# Altium PCB 2014 10 1 主控板 KL25Z128VLK4.PCBDOC
Units mil, origin at the board's own origin, x right, y up, seen from the top; angles counter-clockwise.
Board outline 3699 x 2447 mil, 2 copper layers (TopLayer, BottomLayer); 69 components, 96 nets, 348 pads, 94 vias.
Unrouted connection lines stored in the file: 1.
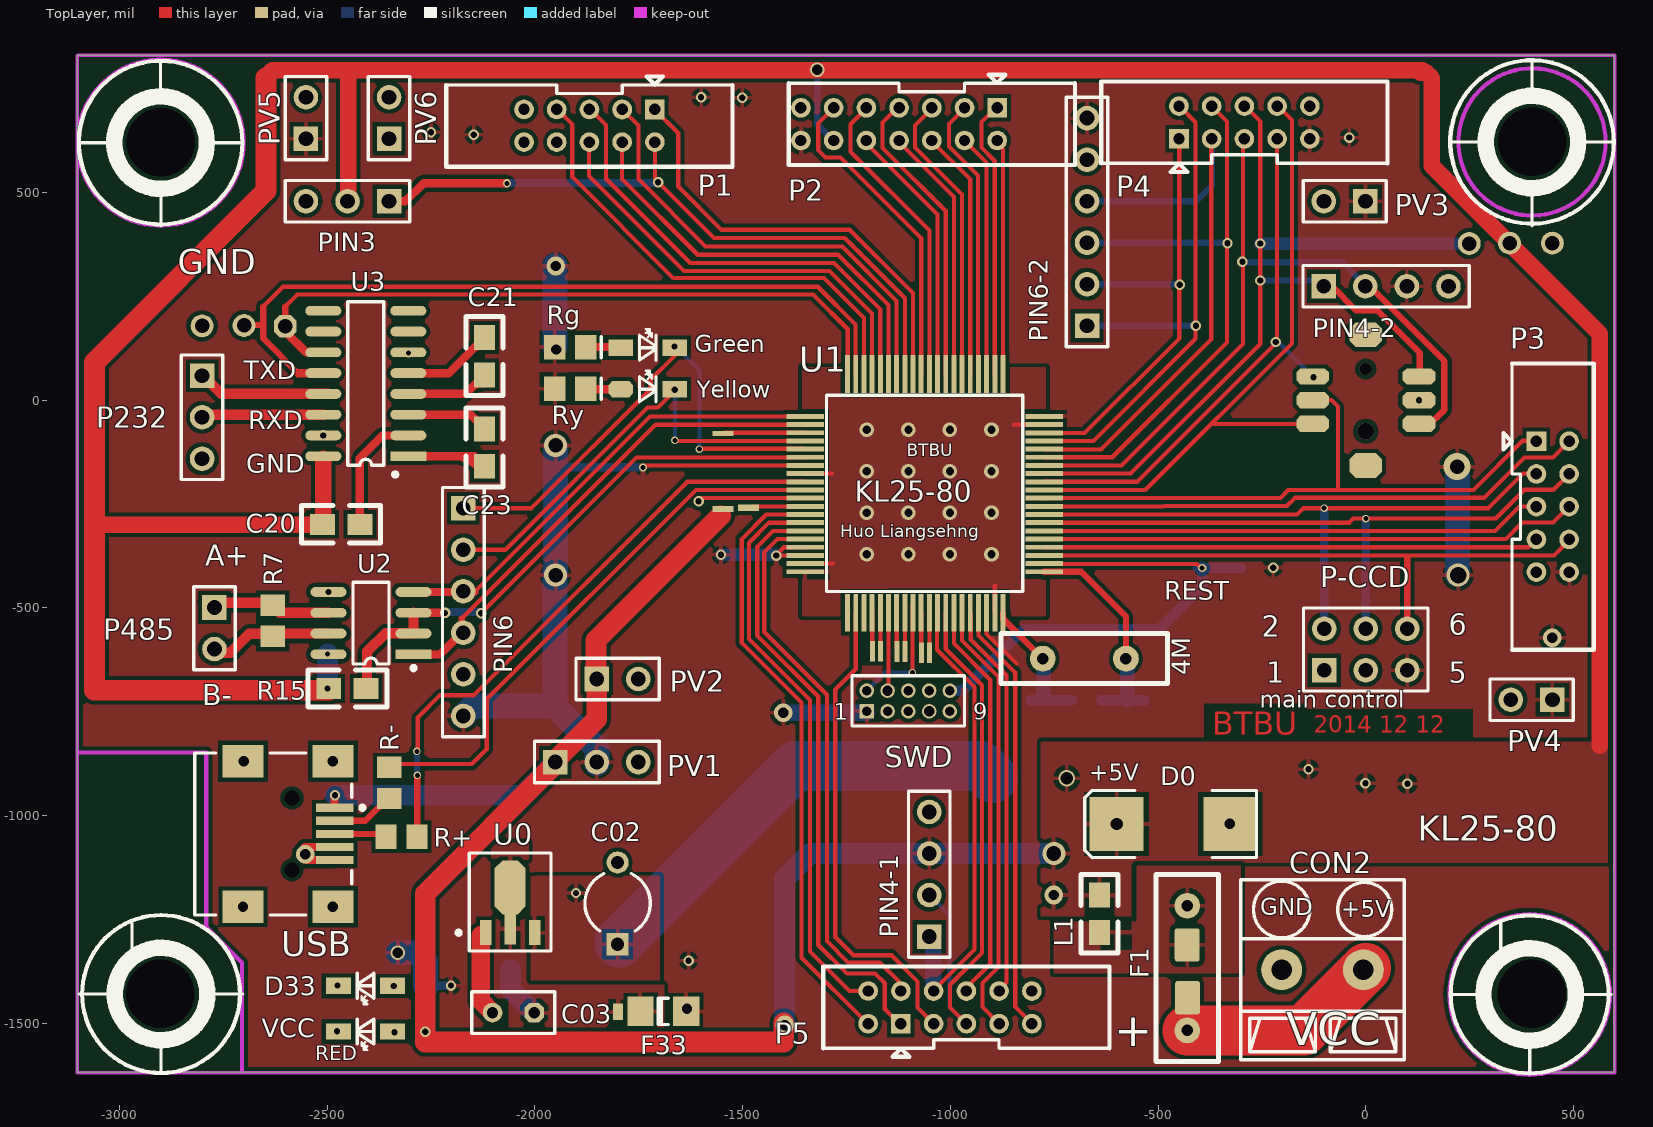
[diagram p0: TopLayer view]
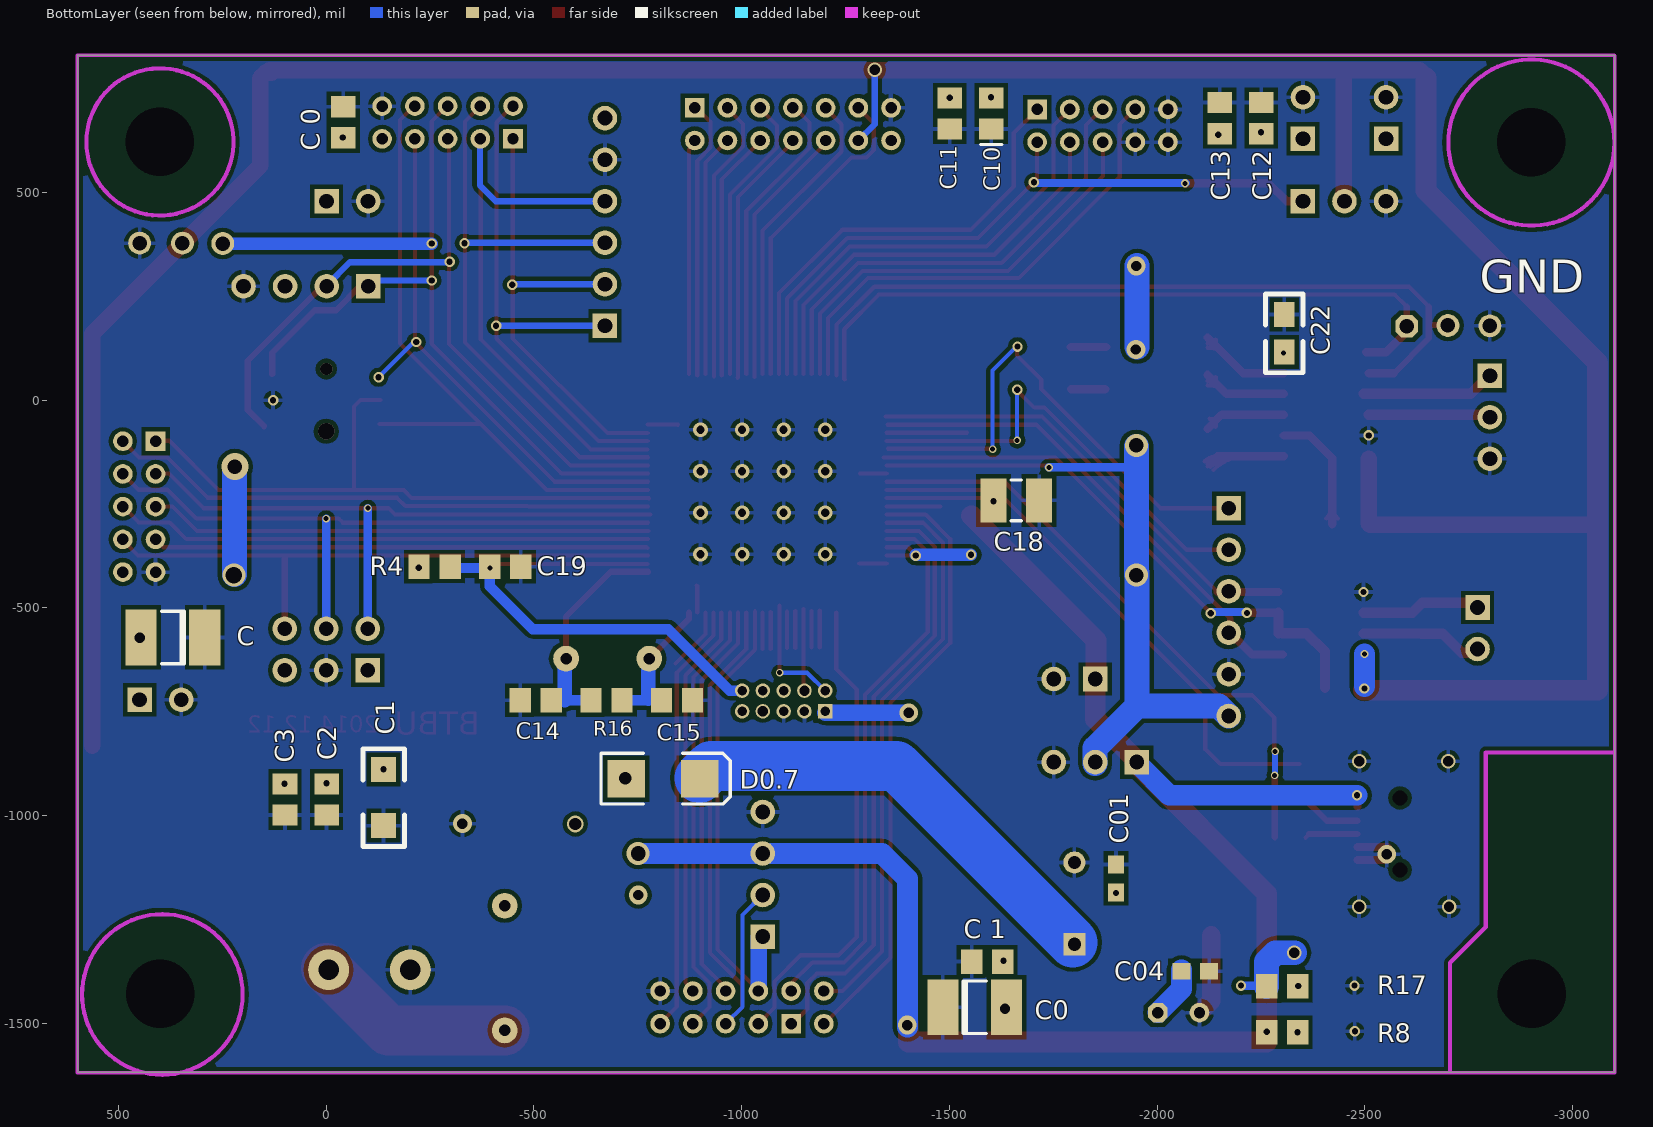
[diagram p1: BottomLayer view, seen from below]

## Layer stack, top to bottom
TopLayer: signal copper 1.4
Dielectric: dielectric 12.6, FR-4, Dk 4.8
BottomLayer: signal copper 1.4

## Board outline
-3100.8,-1617.12 -3100.8,829.88 598.2,829.88 598.2,-1617.12

## Design rules (kind name [scope] priority, off if disabled: settings)
Clearance [All] p1: gap=6
ComponentClearance [All] p1: gap=5 collisioncheckmode=0 verticalgap=10
PlaneClearance [All] p1: clearance=10
PolygonConnect [All] p1: connectstyle=Relief reliefconductorwidth=10 reliefentries=4 polygonreliefangle="90 Angle"
RoomDefinition "2014 10 1 主控板 KL25Z128VLK4" [InComponentClass('2014 10 1 主控板 KL25Z128VLK4')] p1: confinementstyle=ConfineIn formatcopy=TRUE lockcomponents=FALSE outline 1252.98,-1567 2071.98,-1567 2071.98,-1019 1252.98,-1019
RoutingVias [All] p1: holewidth=12 width=18 viastyle="Through Hole" minholewidth=12 minwidth=18 maxholewidth=150 maxwidth=150
SolderMaskExpansion [All] p1: expansion=4
TestPointUsage [All] p1: valid=0 allowmultiple=FALSE
Testpoint [All] p1: side=7 testpointundercomponent=TRUE minsize=40 maxsize=100 preferedsize=60 minholesize=20 maxholesize=40 preferedholesize=32 testpointgrid=1 style=1021 order=0-112345678
Width [All] p1: maxlimit=200 minlimit=10 preferedwidth=10
17 further rules are at their usual default settings.

## Components (designator, comment, footprint, x,y, rotation, side; value= is the part's Value field where it differs from the comment)
4M "XTAL" XTAL1 -577.4,-622.12 r180 top
C "Cap Pol3" 1812 369.2,-571.12 r0 bottom
C0 "Cap Pol3" 1812 -1560.8,-1461.12 r180 bottom
C1 "16V/10uF" 1206 -138.02,-889 r270 bottom
C01 "C1" 1608[0603] -1900.8,-1151.12 r270 bottom
C02 "47uf" CAPR5-4X5 -1800.8,-1211.12 r90 top
C2 "" 2012[0805] -0.8,-961.12 r90 bottom
C03 "47uf" RAD-0.1 -2051.8,-1474.12 r180 top
C3 "" 2012[0805] 99.2,-961.12 r90 bottom
C04 "C1" 1608[0603] -2091.8,-1374.12 r0 bottom
C10 "" 0805#1 -1600.8,689.88 r90 bottom
C11 "" 2012[0805] -1500.8,689.88 r90 bottom
C12 "" 2012[0805] -2250.8,678.88 r270 bottom
C13 "" 2012[0805] -2150.8,678.88 r270 bottom
C14 "22pF" 2012[0805] -504.4,-722.12 r0 bottom
C15 "22pF" 2012[0805] -844.4,-722.12 r0 bottom
C18 "" 3225[1210] -1660.8,-241.12 r0 bottom
C19 "1uF" 2012[0805] -430.8,-401.12 r180 bottom
C20 "470nF" 0805#2 -2421.02,-299 r180 top
C21 "470nF" 0805#2 -2121.02,61 r90 top
C22 "470nF" 0805#2 -2306.02,206 r270 bottom
C23 "470nF" 0805#2 -2121.02,-159 r90 top
"C 0" "1uF" 2012[0805] -40.8,668.88 r90 bottom
"C 1" "1uF" 2012[0805] -1590.8,-1351.12 r0 bottom
CON2 "POWER" CON2 -894.69,-1591.9 r180 top
D0 "Diode" SMC -462.8,-1020.12 r180 top
D0.7 "D Schottky" SMB -810.8,-911.12 r180 bottom
D33 "" LED-1206#1 -2300.8,-1391.12 r270 top
F1 "FUSE1" RAD0.3 -429.69,-1516.9 r90 top
F33 "Fuse 1" C1206 -1690.8,-1471.12 r0 top
Green "Work-led" LED-1206#1 -1834.8,107.88 r90 top
L1 "10mH" 0805#2 -640.8,-1281.12 r90 top
P1 "JTAG" IDC10S#1 -1710.8,698.88 r0 top
P2 "JTAG" IDC10S#2 -886.8,702.88 r0 top
P3 "JTAG" IDC10S#2 411.65,-98.6 r90 top
P4 "JTAG" IDC10S#2 -449.8,629.88 r180 top
P5 "JTAG" IDC10S#2 -1119.02,-1500 r180 top
P232 "Header 3" HDR1X3 -2800.8,58.88 r270 top
P485 "Header 2" HDR1X2 -2771.02,-499 r270 top
P-CCD "Header 3X2" HDR2X3 -100,-650 r0 top
PIN3 "Header 3" HDR1X3 -2350.8,478.88 r180 top
PIN4-1 "Header 4" HDR1X4 -1050.8,-1291.12 r90 top
PIN4-2 "Header 4" HDR1X4 -100.98,274 r0 top
PIN6 "Header 6" HDR1X6 -2171.98,-260 r270 top
PIN6-2 "Header 6" HDR1X6 -670.8,178.88 r90 top
PV1 "Header 3" HDR1X3 -1950.8,-871.12 r0 top
PV2 "Header 2" HDR1X2 -1850.8,-671.12 r0 top
PV3 "Header 2" HDR1X2 -0.8,478.88 r180 top
PV4 "Header 2" HDR1X2 449.2,-721.12 r180 top
PV5 "Header 2" HDR1X2 -2550.8,628.88 r90 top
PV6 "Header 2" HDR1X2 -2350.8,628.88 r90 top
R4 "4.7K" 2012[0805] -260.8,-401.12 r180 bottom
R7 "120R" 2012[0805] -2630.8,-531.12 r90 top
R8 "510R" 2012[0805] -2300.8,-1521.12 r0 bottom
R15 "510R" 0805#2 -2406.02,-694 r180 top
R16 "10M" 2012[0805] -674.4,-722.12 r180 bottom
R17 "Res3" 2012[0805] -2300.8,-1411.12 r0 bottom
R+ "33" 2012[0805] -2320.8,-1051.12 r0 top
R- "33" 2012[0805] -2350.8,-921.12 r90 top
RED "Power-led" LED-1206#1 -2300.8,-1501.12 r270 top
Rg "510R" 0805#1 -1914.8,127.88 r180 top
Ry "510R" 0805#1 -1914.8,27.88 r180 top
SWD "MHDR2X5" MHDR2X5 -1201.02,-749 r0 top locked
U0 "LM1117 IMPX 3.3" SOT89 -2059.31,-1227.12 r0 top
U1 "KL25" MCU9S12 -1349.02,-39 r0 top locked
U2 "MAX485CSA" max485 -2241.02,-639 r180 top locked
U3 "MAX232EJE" MAX232 -2261.02,-159 r180 top
USB "440479-2" 440479 -2791.02,-1044 r180 top
Yellow "TS-LED" LED-1206#2 -1834.8,7.88 r90 top

## Footprints (in the part's own frame and the unit in brackets; to place one, negate y for a bottom-side part, rotate by r counter-clockwise, add the part's x,y. Pads: shape width x height; smd on the part's side, far side on the other; paste and mask are expansions set on the pad)
0805#1 [mm] "Chip Capacitor; Body 2.0 x 1.2 mm (LxW typ)"
  rect 1.3x1.5 smd: 1(-0.95,0) 2(0.95,0)
  silkscreen extent -1.9,-0.65 -1.9,0.65
0805#2 [mm]
  rect 1.524x1.27 smd: 1(0,0) 2(2.286,0)
  silkscreen extent -1.27,-1.14 3.56,1.14
1206 [mil]
  rect 60x60 smd: 1(0,0) 2(135,0)
  silkscreen extent -50,-50 185,50
1608[0603] [mm] "Chip Capacitor; Body 1.6 x 0.8 mm (LxW typ)"
  rect 1.1x1 smd: 1(-0.85,0) 2(0.85,0)
1812 [mm] "Chip Capacitor; Body 4.5 x 3.2 mm (LxW typ)"
  rect 1.9x3.4 smd: 1(-1.95,0) 2(1.95,0)
  silkscreen extent -0.7,-1.6 0.7,1.6
2012[0805] [mm] "Chip Resistor; Body 2.0 x 1.3 mm (LxW typ)"
  rect 1.3x1.5 smd: 1(-0.95,0) 2(0.95,0)
3225[1210] [mm] "Chip Resistor; Body 3.2 x 2.5 mm (LxW typ)"
  rect 1.6x2.7 smd: 1(-1.4,0) 2(1.4,0)
  silkscreen extent -0.3,-1.25 0.3,1.25
440479 [mm] "Connector; USB2.0, Type AB, SM; 5 Position; Right Angle"
  rect 2.3x0.5 smd: 1(-7.85,-1.6) 2(-7.85,-0.8) 3(-7.85,0) 4(-7.85,0.8) 5(-7.85,1.6)
  rect 2.5x2 smd: 6(-7.75,4.45) 7(-2.25,4.45) 8(-7.75,-4.45) 9(-2.25,-4.45)
  round 0.6 hole 0.9 unplated: MH1(-5.25,2.2) MH2(-5.25,-2.2)
  silkscreen extent -9.68,-4.95 0.7,4.95
C1206 [mm] "Chip Capacitor; Body 3.2 x 1.6 mm (LxW typ)"
  rect 1.6x1.8 smd: 1(-1.4,0) 2(1.4,0)
  silkscreen extent -0.3,-0.8 0.3,0.8
CAPR5-4X5 [mm] "Capacitor; 2 Leads"
  rect 1.35x1.35 hole 0.8: 1(-2.5,0)
  round 1.35 hole 0.8: 2(2.5,0)
  silkscreen extent -1.69,-2 1.82,2
CON2 [mm]
  round 2.5 hole 1.25: 1(-17.585,-5.611) 2(-22.58,-5.611)
  silkscreen extent -25.08,-11.11 -15.08,-0.11
HDR1X2 [mm] "Connector; Header; 2 Position"
  rect 1.5x1.5 hole 0.9: 1(0,0)
  round 1.5 hole 0.9: 2(2.54,0)
  silkscreen extent -1.27,-1.27 3.81,1.27
HDR1X3 [mm] "Connector; Header; 3 Position"
  rect 1.5x1.5 hole 0.9: 1(0,0)
  round 1.5 hole 0.9: 2(2.54,0) 3(5.08,0)
  silkscreen extent -1.27,-1.27 6.35,1.27
HDR1X4 [mm] "Connector; Header; 4 Position"
  rect 1.5x1.5 hole 0.9: 1(0,0)
  round 1.5 hole 0.9: 2(2.54,0) 3(5.08,0) 4(7.62,0)
  silkscreen extent -1.27,-1.27 8.89,1.27
HDR1X6 [mm] "Connector; Header; 6 Position"
  rect 1.5x1.5 hole 0.9: 1(0,0)
  round 1.5 hole 0.9: 2(2.54,0) 3(5.08,0) 4(7.62,0) 5(10.16,0) 6(12.7,0)
  silkscreen extent -1.27,-1.27 13.97,1.27
HDR2X3 [mm] "Connector; Header; 3x2 Position"
  rect 1.5x1.5 hole 0.9: 1(0,0)
  round 1.5 hole 0.9: 2(0,2.54) 3(2.54,0) 4(2.54,2.54) 5(5.08,0) 6(5.08,2.54)
  silkscreen extent -1.27,-1.27 6.35,3.81
IDC10S#1 [mm]
  rect 1.2x1.2 hole 0.7: 1(-0.006,0.022)
  round 1.2 hole 0.7: 2(-0.006,-1.978) 4(-2.006,-1.978) 5(-4.006,0.022) 6(-4.006,-1.978) 7(-6.006,0.022) 8(-6.006,-1.978) 9(-8.006,0.022) 10(-8.006,-1.978)
  round 1.219 hole 0.7: 3(-2.006,0.022)
  silkscreen extent -12.76,-3.48 4.74,2.04
IDC10S#2 [mm]
  rect 1.2x1.2 hole 0.7: 1(-0.006,0.022)
  round 1.2 hole 0.7: 2(-0.006,-1.978) 3(-2.006,0.022) 4(-2.006,-1.978) 5(-4.006,0.022) 6(-4.006,-1.978) 7(-6.006,0.022) 8(-6.006,-1.978) 9(-8.006,0.022) 10(-8.006,-1.978)
  silkscreen extent -12.76,-3.48 4.74,2.04
LED-1206#1 [mil]
  rect 39x60 smd: 1(18.45,-41.65) 2(18.45,-171.65)
  silkscreen extent -12,-127 63,-87
LED-1206#2 [mil]
  oct 39x60 smd: 1(18.45,-41.65)
  rect 39x60 smd: 2(18.45,-171.65)
  silkscreen extent -12,-127 63,-87
MAX232 [mm]
  rect 2.2x0.6 smd: 1(1.101,-0.612)
  oval 2.2x0.6 smd: 2(1.101,-1.882) 3(1.101,-3.152) 4(1.101,-4.422) 5(1.101,-5.692) 6(1.101,-6.962) 7(1.101,-8.232) 8(1.101,-9.502) 9(6.301,-9.502) 10(6.301,-8.232) 11(6.301,-6.962) 12(6.301,-5.692) 13(6.301,-4.422) 14(6.301,-3.152) 15(6.301,-1.882) 16(6.301,-0.612)
  silkscreen extent 1.78,-10.06 4.8,0.63
max485 [mm]
  rect 2.2x0.6 smd: 1(1.293,-0.696)
  oval 2.2x0.6 smd: 2(1.293,-1.966) 3(1.293,-3.236) 4(1.293,-4.506) 5(6.493,-4.506) 6(6.493,-3.236) 7(6.493,-1.966) 8(6.493,-0.696)
  silkscreen extent 1.17,-5.1 4.99,0.28
MCU9S12 [mm] "80-Pin Plastic Quad Flat Pack 0.65"
  rect 2.3x0.3 smd: 1(0,0) 2(0,-0.5) 3(0,-1) 4(0,-1.5) 5(0,-2) 6(0,-2.5) 7(0,-3) 8(0,-3.5) 9(0,-4) 10(0,-4.5) 11(0,-5) 12(0,-5.5) 13(0,-6) 14(0,-6.5) 15(0,-7) 16(0,-7.5) 17(0,-8) 18(0,-8.5) 19(0,-9) 20(0,-9.5) 41(14.6,-9.5) 42(14.6,-9) 43(14.6,-8.5) 44(14.6,-8) 45(14.6,-7.5) 46(14.6,-7) 47(14.6,-6.5) 48(14.6,-6) 49(14.6,-5.5) 50(14.6,-5) 51(14.6,-4.5) 52(14.6,-4) 53(14.6,-3.5) 54(14.6,-3) 55(14.6,-2.5) 56(14.6,-2) 57(14.605,-1.5) 58(14.605,-1.016) 59(14.605,-0.5) 60(14.605,0)
  rect 0.3x2.3 smd: 21(2.586,-12) 22(3.086,-12) 23(3.586,-12) 24(4.086,-12) 25(4.586,-12) 26(5.086,-12) 27(5.586,-12) 28(6.086,-12) 29(6.586,-12) 30(7.086,-12) 31(7.586,-12) 32(8.086,-12) 33(8.586,-12) 34(9.086,-12) 35(9.586,-12) 36(10.086,-12) 37(10.586,-12) 38(11.086,-12) 39(11.586,-12) 40(12.086,-12) 61(12.086,2.593) 62(11.586,2.593) 63(11.086,2.593) 64(10.586,2.593) 65(10.086,2.593) 66(9.586,2.593) 67(9.086,2.593) 68(8.586,2.593) 69(8.086,2.593) 70(7.586,2.593) 71(7.086,2.593) 72(6.586,2.593) 73(6.086,2.593) 74(5.586,2.593) 75(5.086,2.593) 76(4.586,2.593) 77(4.086,2.593) 78(3.586,2.593) 79(3.086,2.593) 80(2.586,2.593)
  round 1 on Top Overlay: ""(0.428,1.783) ""(1.978,0.633)
  silkscreen extent 1.29,-10.71 13.29,1.29
MHDR2X5 [mil] "Connector; Header; 5x2 Position"
  rect 35x35 hole 23: 1(0,0)
  round 35 hole 23: 2(0,50) 3(50,0) 5(100,0) 6(100,50) 8(150,50) 9(200,0) 10(200,50)
  round 35 hole 25: 4(50,50) 7(150,0)
  silkscreen extent -35,-35 235,85
RAD0.3 [mil]
  round 62 hole 28: 1(0,0) 2(300,0)
  silkscreen extent -75,-75 375,75
RAD-0.1 [mm] "Indicating Instrument; 2 Leads"
  oct 1.2x1.2 hole 0.7: 1(-1.27,0)
  round 1.2 hole 0.7: 2(1.27,0)
  silkscreen extent -2.54,-1.27 2.54,1.27
SMB [mm] "DO-214-AA/SMB; 2 C-Bend Leads; Body 5.3 x 3.6 mm, inc. leads (LxW)"
  rect 2.3x2.3 smd: 1(-2.25,0) 2(2.25,0)
  silkscreen extent -3.8,-1.55 4.1,1.55
SMC [mm] "DO-214-AB/SMC; 2 C-Bend Leads; Body 7.9 x 5.9 mm, inc. leads (LxW)"
  rect 3.302x3.3 smd: 1(-3.475,0) 2(3.475,0)
  silkscreen extent -5.07,-2.05 5.43,2.05
SOT89 [mm] "SOT-89; Body 4.6 x 4.25 mm, inc. leads (LxW max)"
  oct 1.9x3.3 smd: 0(0,1.388)
  rect 0.7x1.524 smd: 1(-1.5,-1.388) 3(1.5,-1.388)
  rect 0.7x1.905 smd: 2(0,-1.163)
  silkscreen extent -3.27,-2.51 2.5,3.49
XTAL1 [mil]
  round 62 hole 28: 1(0,0) 2(200,0)
  silkscreen extent -100,-60 300,60

## Part data
4M: "Crystal Oscillator"
C C0: "Polarized Capacitor (Surface Mount)"
C01 C04: library part "Cap Semi", "Capacitor (Semiconductor SIM Model)"
C02: library part "Cap Pol3", "Polarized Capacitor (Surface Mount)"
C03: library part "Cap Pol1", "Polarized Capacitor (Radial)"
"C 0" "C 1": library part CAP, "Capacitor"
CON2: library part CON2, "Connector"
D0: "Default Diode"
D0.7: "Schottky Diode"
D33: library part LED3, "Typical BLUE SiC LED"
F33: "Fuse"
P1 P3 P4 P5: library part "HEADER 5X2_2"
P2: library part "Header 3", "Header, 3-Pin"
P232 PIN3 PV1: "Header, 3-Pin"
P485 PV2 PV3 PV4 PV5 PV6: "Header, 2-Pin"
P-CCD: "Header, 3-Pin, Dual row"
PIN4-1 PIN4-2: "Header, 4-Pin"
PIN6 PIN6-2: "Header, 6-Pin"
R17: "Resistor"
R+ R- Rg Ry: library part RES2
RED: library part LED
SWD: "Header, 5-Pin, Dual row"
U0: library part "Volt Reg", "Voltage Regulator"
USB: "USB 2.0, Right Angle, SMT, AB Type, Receptacle, 5 Position, Black"

## Free pads (board coordinates)
  rect 25x40 smd: 0(-1799.8,-1472.12)
  rect 50x15 smd: 0(-1485.8,-259.12) 1(-1546.8,-262.12)
  round 47.24 hole 27.56: 0(-1359.46,625) 0(-1359.46,703.74) 0(-1280.72,625) 0(-1280.72,703.74)
  round 47.22 hole 27.56: 0(-1197.54,-1422.12) 1(-1197.54,-1500.86)
  rrect20% 60x80 smd: 0(-428.8,-1438.12) 1(-429.8,-1311.12)
  oct 78.74x39.37 smd: 0(-127.95,-57.09) 0(-127.95,0) 0(-127.95,57.09) 0(127.95,-57.09) 0(127.95,0) 0(127.95,57.09)
  oct 78.74x60 smd: 0(0,-157.48) 0(0,157.48)
  rect 12x50 smd: 1(-1187.8,-604.12) 1(-1167.8,-604.12) 1(-1128.8,-605.12) 1(-1108.8,-605.12) 1(-1069.8,-608.12) 1(-1049.8,-608.12)
  oct 55x55 hole 35: 2(-2600.8,177.88)
  rect 50x12 smd: 2(-1546.8,-80.12)
  round 55 hole 35: 3(-2699.8,179.88) 4(-2800.8,178.88) 10(249.02,377) 11(346.02,378) 12(449.02,378)

## Via types
v1: diameter 25, hole 15, TopLayer to BottomLayer, 38 vias
v2: diameter 35, hole 20, TopLayer to BottomLayer, 16 vias
v3: diameter 45, hole 25, TopLayer to BottomLayer, 9 vias
v4: diameter 18, hole 12, TopLayer to BottomLayer, 7 vias
v5: diameter 35, hole 25, TopLayer to BottomLayer, 6 vias
v6: diameter 20, hole 12, TopLayer to BottomLayer, 5 vias
v7: diameter 160, hole 165, TopLayer to BottomLayer, 4 vias
v8: diameter 55, hole 35, TopLayer to BottomLayer, 3 vias
v9: diameter 40, hole 30, TopLayer to BottomLayer, 2 vias
v10: diameter 40, hole 40, TopLayer to BottomLayer, 1 vias
v11: diameter 30, hole 30, TopLayer to BottomLayer, 1 vias
v12: diameter 55, hole 40, TopLayer to BottomLayer, 1 vias
v13: diameter 65, hole 35, TopLayer to BottomLayer, 1 vias

## Nets (pads, with @x,y where several pads share a name; then routed paths per layer and width w, separated by ;. In a path a pad name is that pad's centre, name@x,y a point inside that pad or via, vN(x,y) a via of type N, cw(c..) or ccw(c..) an arc to the next point about the centre after c; other vN are vias at no path point)
3.3V: "C 0.1" "C 1.1" C0.2 C10.2 C11.2 C12.2 C13.2 C.2 F33.2 P3.10 P4.9 P-CCD.5 pad.0@-1359.46,625 PIN4-1.3 PIN4-2.3 PIN6-2.6 PIN6.6 PV1.2 PV3.1 PV4.1 PV5.1 R4.1 R17.2 Rg.2 Ry.2 SWD.1 U1.7 U1.17 U1.18 U1.38 U1.60 | length 2929.3
  TopLayer w10: v6@-1742.8,-157.11 v6@-1737.81,-157.11 ; v6@-1736.8,-157.11 U1.7 ; U1.18 -1419.8,-373.65 -1400.12,-353.96 U1.17 ; U1.38 -912.57,-562.46 -841.02,-634
  TopLayer w12: v1@-1418.8,-378.12 v1@-1418.8,-373.65
  BottomLayer w10: R17.2@-2264.8,-1410.12 R17.2@-2263.8,-1409.12
  BottomLayer w20: R17.2@-2263.8,-1409.12 v1(-2201.8,-1409.12) ; -1942.8,-161.12 v6@-1738.8,-161.12
  BottomLayer w30: v1(-1551.8,-372.12) v1@-1418.8,-372.12
  BottomLayer w40: v3(-1401.8,-752.12) SWD.1@-1201.8,-752.12
  BottomLayer w50: v3@-1951.8,127.88 v3@-1947.8,123.88
  BottomLayer w60: v5(-2330,-1330) -2285,-1330 -2263.4,-1351.6 R17.2 ; PIN6.6 -2148.1,-736.12 -1951.8,-736.12 ; v8@-1951.8,-414.12 -1951.8,-736.12 ; v3@-1951.8,127.88 v3@-1951.8,323.88 ; v8(-1949.8,-421.12) v8@-1949.8,-111.12 ; PV1.2@-1850.8,-875.12 -1850.8,-837.12 -1951.8,-736.12 ; v12@221.2,-420.12 v13@221.2,-170
  other v1: -1629.8,-1349.12 -222.8,-403.12 -1418.8,-374.12 -39.8,631.88 -2146.8,638.88 -2250,645 -1500.8,727.88 -1599.8,728.88
  other v3: -1633.8,-1465.12 449.2,-572.12 -1948.8,121.88 -1949.8,322.88
  other v6: -1739.8,-162.12
  other v8: -1949.98,-109
  other v12: 222.2,-421.12
  other v13: 220,-160
6V: PV6.1
485-A: P485.1 R7.2 U2.6 | length 302.2
  TopLayer w25: P485.1@-2789.02,-488 -2638.02,-488 -2614.43,-511.59 U2.6
AO: P3.8 P-CCD.6 U1.43 | length 1460.6
  TopLayer w10: U1.43 -339.33,-373.65 ; -343.8,-373.65 -11.8,-373.72 ; -17.13,-373.72 452.87,-373.72 P3.8@490.87,-335.72
  TopLayer w15: P-CCD.6 100,-380
CLK: P4.3 PIN6-2.4 U1.56 | length 1423.3
  TopLayer w10: U1.56@-772.8,-119.12 -636.8,-119.12 -372.06,145.62 P4.3@-372.06,629.88
  BottomLayer w10: PIN6-2.4@-670.8,481 PIN6-2.4@-668.69,478.88
  BottomLayer w15: PIN6-2.4@-668.69,478.88 -407.8,478.88 -369.8,516.88 P4.3@-369.8,627.88
CS: P4.1 PIN6-2.2 U1.58 | length 1121.6
  TopLayer w10: U1.58 -676.69,-79 -448.8,148.88 P4.1@-448.8,628.88
  BottomLayer w15: PIN6-2.2 v1@-448.8,278.88
  other v1: -447.8,277.88
D/C: P4.2 PIN6-2.1 U1.57 | length 1300.6
  TopLayer w10: U1.57 -655.74,-98.06 -409.8,147.88 -409.8,668.98 P4.2@-447.58,706.76
  BottomLayer w15: PIN6-2.1@-668.8,178.88 v1(-408.8,178.88)
DAC0: P5.3 U1.22 | length 1161.2
  TopLayer w10: U1.22 -1227.53,-646.84 -1276.8,-696.12 -1276.8,-1292.12 -1232.8,-1336.12 -1141.8,-1336.12 -1078.8,-1399.12 -1078.8,-1462.12 P5.3
DIREC: P1.2 PIN3.1 U1.73 | length 1660.2
  TopLayer w10: P1.2@-1710.8,621.88 -1710.8,531.88 -1568.92,390 -1254.02,390 -1109.42,245.39 U1.73
  TopLayer w20: PIN3.1 -2311.12,478.88 -2268.12,521.88 v6(-2066.8,521.88)
  BottomLayer w20: v6@-2068.8,522.88 v1@-1702.8,522.88
  other v1: -1703.22,524.3
DM0: pad.0@-1197.54,-1422.12 U1.14 | length 1380.3
  TopLayer w10: U1.14 -1436.59,-294.91 -1484.8,-343.12 -1484.8,-575.12 -1337.8,-722.12 -1337.8,-1327.12 -1242.8,-1422.12 pad.0@-1197.54,-1422.12
DM3: P5.2 U1.16 | length 1346.4
  TopLayer w10: -1447.8,-366.12 -1447.8,-558.12 -1296.8,-709.12 -1296.8,-1302.12 -1245.8,-1353.12 -1169.8,-1353.12 -1118.8,-1404.12 P5.2@-1118.8,-1421.12 ; -1446.8,-365.12 -1415.96,-334.28 U1.16
DP0: pad.1@-1197.54,-1500.86 U1.13 | length 1473.9
  TopLayer w10: U1.13 -1442.91,-275.22 -1501.8,-334.12 -1501.8,-584.12 -1357.8,-728.12 -1357.8,-1342.12 pad.1@-1195.8,-1504.12
DP3: P5.1 U1.15 | length 1467.3
  TopLayer w10: U1.15 -1426.33,-314.59 -1464.8,-353.06 -1464.8,-566.12 -1317.8,-713.12 -1317.8,-1311.12 -1248.8,-1380.12 -1180.8,-1380.12 -1157.8,-1403.11 -1157.8,-1465.12 P5.1@-1117.8,-1505.12
EXTAL: 4M.2 C15.2 R16.2 U1.40 | length 345
  TopLayer w15: U1.40 -873.2,-526.32 4M.2
  BottomLayer w25: C15.2 R16.2@-707.4,-722.12
  BottomLayer w35: -775.4,-718.12 4M.2@-775.4,-623.12
GND: "C 0.2" "C 1.2" C0.1 C01.1 C1.2 C2.1 C02.2 C3.1 C03.2 C04.1 C10.1 C11.1 C12.1 C13.1 C14.2 C15.1 C18.1 C19.2 C22.1 C.1 CON2.1 D0.1 D33.2 P1.8 P1.9 P1.10 P3.9 P4.10 P5.10 P232.3 P-CCD.3 pad.0@127.95,0 pad.0@-1359.46,703.74 pad.4 pad.12 PIN3.3 PIN4-1.4 PIN4-2.4 PIN6-2.5 PIN6.5 PV1.3 PV2.2 PV3.2 PV4.2 PV5.2 PV6.2 RED.2 SWD.3 SWD.5 U0.1 U1.8 U1.19 U1.20 U1.39 U1.59 U2.5 U3.15 USB.4 USB.5 USB.6 USB.7 USB.8 USB.9 | length 608.2
  TopLayer w10: U1.19 -1346.48,-393.33 -1283.02,-393.33 -1282.8,-393.12 ; U1.8 -1284.48,-176.8 ; U1.39 -892.88,-447.2 -891.8,-446.12 ; -846.8,-59.12 -846.37,-58.69 U1.59
  TopLayer w20: v3@-2553.43,-1075.49 USB.4 ; v3@-2551.68,-1106.99 USB.5
  TopLayer w45: U0.1@-2130,-1288.32 -2130,-1445.92 C03.2
  other v1: -2475.8,-1519.12 -2474.8,-1409.12 -2496.64,-461.59 -2509.09,-84.89 127.95,0
  other v2: -1200.8,-371.12 -1100.8,-371.12 -1000.8,-371.12 -900.8,-371.12 -1200.8,-271.12 -1100.8,-271.12 -1000.8,-271.12 -900.8,-271.12 -1200.8,-171.12 -1100.8,-171.12 -1000.8,-171.12 -900.8,-171.12 -1200.8,-71.12 -1100.8,-71.12 -1000.8,-71.12 -900.8,-71.12
  other v3: -2552.8,-1093.12 -327.8,-1019.12
  other v5: -2702.44,-1219.2 -2485.91,-1219.2 -2700.8,-869.12 -2486.8,-869.12
I2C0_SCL: pad.1@-1187.8,-604.12 U1.24 | length 89
  TopLayer w10: pad.1@-1187.8,-595.12 U1.24@-1187.8,-506.12
I2C0_SDA: pad.1@-1167.8,-604.12 U1.25 | length 87.7
  TopLayer w10: pad.1@-1168.36,-595.12 U1.25@-1168.36,-507.44
KEY: PIN6.2 U1.4 Yellow.2 | length 1108.6
  TopLayer w10: PIN6.2@-2173.98,-360 -2070.98,-360 -1728.98,-18 -1703.98,-18 -1666.46,19.52 Yellow.2@-1657.5,19.52 ; v4@-1660.98,-98.06 U1.4
  BottomLayer w10: v4(-1662.98,-97) v1@-1662.98,26
  other v1: -1662.98,25
LED: Green.2 PIN6.1 U1.5 | length 1220.5
  TopLayer w10: PIN6.1 -2007.98,-260 -1720.98,27 -1720.98,50 -1662.98,108 Green.2@-1662.98,130 ; v4@-1602.98,-117.12 U1.5@-1351.8,-117.12
  BottomLayer w10: v1@-1662.98,130 -1603.98,71 v4(-1603.98,-118)
  other v1: -1663.8,128.88
MODE: P4.4 PIN6-2.3 U1.55 | length 1471.1
  TopLayer w10: U1.55 -610.11,-137.43 -333.8,138.88 -333.8,670.72 P4.4
  BottomLayer w15: PIN6-2.3 v1@-338.8,378.88
  other v1: -332.8,377.88
NetC01_2: C01.2 C02.1 D0.7.2 U0.3 | length 1087.1
  BottomLayer w120: C02.1@-1796.8,-1305.12 -1371.8,-880.12 -926.8,-880.12 D0.7.2@-897.8,-909.12
  other v1: -1900.8,-1186.12
NetC03_1: C03.1 C04.2 F33.1 pad.0@-1799.8,-1472.12 U0.0 U0.2 | length 130.6
  TopLayer w10: C03.1@-2001.8,-1473.12 C03.1@-1997.8,-1473.12
  BottomLayer w50: C04.2@-2058.8,-1371.12 -2058.8,-1417.12 C03.1
NetC20_1: C20.1 U3.2 | length 502.4
  TopLayer w10: -2421.02,-250.72 ccw(c-2372.74,-250.72) -2406.88,-284.86 cw(c-2372.74,-250.72) -2421.02,-250.72 ; -2421.02,-250.72 cw(c-2469.31,-250.72) -2435.17,-284.86 ccw(c-2469.31,-250.72) -2421.02,-250.72 ; -2352.3,-84.89 ccw(c-2352.3,-68.45) -2340.68,-80.07 cw(c-2352.3,-68.45) -2352.3,-84.89 ; -2352.3,-84.89 cw(c-2352.3,-101.33) -2340.68,-89.71 ccw(c-2352.3,-101.33) -2352.3,-84.89
  TopLayer w20: C20.1 -2421.02,-139 -2366.91,-84.89 U3.2
NetC21_1: C21.1 U3.4 | length 462.6
  TopLayer w10: -2256.42,15.11 cw(c-2256.42,31.55) -2268.05,19.93 ccw(c-2256.42,31.55) -2256.42,15.11 ; -2256.42,15.11 ccw(c-2256.42,-1.33) -2268.05,10.29 cw(c-2256.42,-1.33) -2256.42,15.11 ; -2163.7,18.32 cw(c-2121.02,-24.36) -2121.02,36 ccw(c-2121.02,-24.36) -2163.7,18.32 ; -2151.63,30.39 ccw(c-2177.24,56) -2141.02,56 cw(c-2177.24,56) -2151.63,30.39 ; -2146.63,35.39 cw(c-2121.02,9.79) -2121.02,46 ccw(c-2121.02,9.79) -2146.63,35.39
  TopLayer w20: U3.4 -2166.91,15.11 C21.1
NetC21_2: C21.2 U3.5 | length 479.1
  TopLayer w10: -2256.42,65.11 cw(c-2256.42,81.55) -2268.05,69.93 ccw(c-2256.42,81.55) -2256.42,65.11 ; -2256.42,65.11 ccw(c-2256.42,48.67) -2268.05,60.29 cw(c-2256.42,48.67) -2256.42,65.11 ; -2163.7,108.32 cw(c-2121.02,65.64) -2121.02,126 ccw(c-2121.02,65.64) -2163.7,108.32 ; -2151.63,120.39 ccw(c-2177.24,146) -2141.02,146 cw(c-2177.24,146) -2151.63,120.39 ; -2146.63,125.39 cw(c-2121.02,99.79) -2121.02,136 ccw(c-2121.02,99.79) -2146.63,125.39
  TopLayer w20: U3.5 -2206.91,65.11 C21.2
NetC22_2: C22.2 U3.6
  other v6: -2304.02,113
NetC23_1: C23.1 U3.1 | length 730.8
  TopLayer w10: C23.1@-2145.13,-134.89 C23.1 ; -2256.42,-134.89 cw(c-2256.42,-118.45) -2268.05,-130.07 ccw(c-2256.42,-118.45) -2256.42,-134.89 ; -2256.42,-134.89 ccw(c-2256.42,-151.33) -2268.05,-139.71 cw(c-2256.42,-151.33) -2256.42,-134.89 ; -2215.44,-134.89 cw(c-2215.44,-248.42) -2135.17,-168.14 ccw(c-2215.44,-248.42) -2215.44,-134.89 ; -2191.3,-134.89 cw(c-2191.3,-224.28) -2128.1,-161.07 ccw(c-2191.3,-224.28) -2191.3,-134.89 ; -2167.16,-134.89 cw(c-2167.16,-200.14) -2121.02,-154 ccw(c-2167.16,-200.14) -2167.16,-134.89 ; C23.1@-2143.02,-134.89 cw(c-2143.02,-175.99) -2113.95,-146.93 ccw(c-2143.02,-175.99) C23.1@-2143.02,-134.89
  TopLayer w20: U3.1 C23.1@-2145.13,-134.89
NetC23_2: C23.2 U3.3 | length 363.7
  TopLayer w10: -2256.42,-34.89 cw(c-2256.42,-18.45) -2268.05,-30.07 ccw(c-2256.42,-18.45) -2256.42,-34.89 ; -2256.42,-34.89 ccw(c-2256.42,-51.33) -2268.05,-39.71 cw(c-2256.42,-51.33) -2256.42,-34.89 ; -2152.63,-37.39 ccw(c-2133,-17.76) -2126.04,-44.64 cw(c-2133,-17.76) -2152.63,-37.39 ; -2151.63,-38.39 cw(c-2177.24,-64) -2141.02,-64 ccw(c-2177.24,-64) -2151.63,-38.39
  TopLayer w20: U3.3 -2155.13,-34.89 C23.2
NetCON2_2: CON2.2 F1.1 pad.0@-428.8,-1438.12 | length 492.1
  TopLayer w120: F1.1 -149.69,-1516.9 CON2.2@0.31,-1366.9
NetD33_1: D33.1 R17.1
  other v1: -2339.8,-1410.12
NetF1_2: F1.2 L1.1 pad.1@-429.8,-1311.12
NetGreen_1: Green.1 Rg.1 | length 85.6
  TopLayer w20: Rg.1 Green.1@-1791.8,127.88
NetP485_2: P485.2 R7.1 U2.7 | length 308.6
  TopLayer w12: R7.1@-2637.02,-562 R7.1@-2636.62,-561.59
  TopLayer w25: P485.2@-2786.02,-607.98 -2733.01,-607.98 -2687.02,-562 R7.1@-2637.02,-562 ; R7.1@-2636.62,-561.59 U2.7
NetR8_1: R8.1 RED.1
  other v1: -2337.8,-1521.12
NetR+_2: R+.2 U1.9 | length 1450.9
  TopLayer w10: v4@-2281.8,-844.12 -2281.8,-764.12 -2227.8,-710.12 -2146.8,-710.12 -1633.17,-196.48 U1.9
  TopLayer w15: R+.2@-2282.8,-1052.12 v4@-2282.8,-906.12
  BottomLayer w15: v4@-2283.8,-904.12 v4@-2283.8,-847.12
  other v4: -2282.8,-903.12 -2283.8,-845.12
NetR-_2: R-.2 U1.10 | length 1336.6
  TopLayer w10: R-.2@-2341.8,-876.12 -2151.8,-876.12 -2115.8,-840.12 -2115.8,-719.78 -1612.19,-216.17 U1.10
NetRy_1: Ry.1 Yellow.1 | length 82.9
  TopLayer w10: Ry.1@-1875.8,26.88 Ry.1@-1875.25,26.33
  TopLayer w20: Ry.1@-1875.25,26.33 Yellow.1
P-A1: P5.4 PIN4-1.1 U1.32 | length 1122
  TopLayer w10: P5.4 -1040.06,-1420.38 -941.8,-1322.12 -941.8,-690.75 -1031.8,-600.75 U1.32@-1031.8,-508.12
  BottomLayer w40: P5.4@-1040.8,-1422.12 PIN4-1.1@-1040.8,-1292.12
P-A2: P4.6 pad.0@127.95,57.09 pad.10 PIN4-2.1 U1.53 | length 2249
  TopLayer w10: U1.53@-774.8,-176.12 -565.8,-176.12 -253.8,135.88 -253.8,670.98 -290.58,707.76 P4.6
  TopLayer w15: PIN4-2.1 -81.09,274 -23.62,216.54 27.56,216.54 129.92,114.17 pad.0@129.92,62.99
  BottomLayer w15: v1(-253.98,288) -114.98,288 PIN4-2.1
  BottomLayer w30: v1(-253.98,377) pad.10
P-B1: P5.5 PIN4-1.2 U1.33 | length 1422.2
  TopLayer w10: U1.33 -1010.99,-598.93 -923.8,-686.12 -923.8,-1330.12 -1000.8,-1407.12 -1000.8,-1461.38 P5.5
  BottomLayer w10: PIN4-1.2@-1051.8,-1189.12 -1001.8,-1239.12 -1001.8,-1460.12 -963.8,-1498.12 P5.5@-963.8,-1501.12
P-B2: P4.5 pad.0@127.95,-57.09 PIN4-2.2 U1.54 | length 1851.7
  TopLayer w10: U1.54 -587.8,-157.11 -295.8,134.88 P4.5@-295.8,631.88
  TopLayer w15: PIN4-2.2 9.46,274 188.98,94.49 188.98,-23.62 pad.0@149.61,-62.99
  BottomLayer w15: v1@-294.98,332 -56.98,332 PIN4-2.2@-0.98,276
  other v1: -296.98,333
PC_RXD: P232.2 U3.14 | length 337.9
  TopLayer w10: U3.14@-2545.4,-39.71 ccw(c-2557.03,-51.33) -2557.03,-34.89 ccw(c-2557.03,-18.45) U3.14@-2545.4,-30.07
  TopLayer w11.81: U3.14@-2544.76,-39.07 ccw(c-2554.84,-49.15) -2554.84,-34.89 ccw(c-2554.84,-20.63) U3.14@-2544.76,-30.71
  TopLayer w25: P232.2@-2798.8,-34.89 U3.14
PC_TXD: P232.1 U3.13 | length 323.7
  TopLayer w25: P232.1@-2799.3,62.38 -2799.3,59.38 -2754.92,15 U3.13@-2497.02,15
PTA1: pad.1@-1128.8,-605.12 U1.27 | length 89
  TopLayer w10: pad.1@-1128.8,-596.12 U1.27@-1128.8,-507.12
PTA2: pad.1@-1108.8,-605.12 U1.28 | length 87.7
  TopLayer w10: pad.1@-1109.36,-596.12 U1.28@-1109.36,-508.44
PTA4: pad.1@-1069.8,-608.12 U1.30 | length 89
  TopLayer w10: pad.1@-1069.8,-599.12 U1.30@-1069.8,-510.12
PTA5: pad.1@-1049.8,-608.12 U1.31 | length 87.7
  TopLayer w10: pad.1@-1050.36,-599.12 U1.31
PTA14: P5.6 U1.34 | length 971.5
  TopLayer w10: U1.34 -991.31,-585.62 -903.8,-673.12 -903.8,-1357.12 -960.8,-1414.12 P5.6@-960.8,-1423.12
PTA15: P5.7 U1.35 | length 1058.6
  TopLayer w10: U1.35 -971.62,-578.3 -883.8,-666.12 -883.8,-1364.12 -922.8,-1403.12 -922.8,-1460.64 P5.7
PTA16: P5.8 U1.36 | length 953.1
  TopLayer w10: U1.36@-950.8,-511.12 -950.8,-576.12 -864.8,-662.12 -864.8,-1401.12 -882.8,-1419.12 P5.8@-882.8,-1421.12
PTA17: P5.9 U1.37 | length 1043.7
  TopLayer w10: U1.37 -932.25,-566.67 -843.8,-655.12 -843.8,-1459.12 P5.9@-801.8,-1501.12
PTB8: P3.4 P-CCD.4 U1.47 | length 1576.2
  TopLayer w10: U1.47 -39.91,-294.91 -30,-285 312.91,-285 382.2,-215.72 451.87,-215.72 P3.4@488.87,-178.72
  BottomLayer w20: P-CCD.4 v4(0,-285)
PTB9: P3.3 P-CCD.2 U1.48 | length 1520.4
  TopLayer w10: U1.48@-779.8,-275.12 -165.12,-275.12 -150,-260 295.31,-260 378.6,-176.72 P3.3@409.87,-176.72
  BottomLayer w20: P-CCD.2 v4(-100,-260)
PTB10: P3.2 U1.49 | length 1328.5
  TopLayer w10: U1.49 -486.22,-255.54 -483.8,-255.12 -190.12,-255.12 -170,-235 285,-235 382.28,-137.72 450.64,-137.72 P3.2
PTB11: P3.1 pad.0@-127.95,0 U1.50 | length 1514.7
  TopLayer w10: U1.50@-776.8,-236.12 -204.88,-235 -186.81,-216.86 259.12,-215.99 376.92,-97.72 P3.1@410.87,-97.72 ; pad.0@-129.92,0 -82.68,0 -66.93,-15.75 -66.93,-216.62
PTB16: P4.8 pad.0@-127.95,-57.09 U1.51 | length 1573.9
  TopLayer w10: U1.51 -530.85,-216.17 -177.8,136.88 -177.8,673.98 -212.58,708.76 P4.8@-214.58,708.76 ; -370.08,-55.12 -369.94,-55.26 -368.11,-57.09 pad.0@-127.95,-57.09
PTB17: P4.7 pad.0@-127.95,57.09 U1.52 | length 1310.8
  TopLayer w10: U1.52 -550.17,-196.48 -213.8,139.88 P4.7@-213.8,630.88
  BottomLayer w10: v1(-216.54,139.88) -210.75,139.88 v1@-129.92,59.06
  other v1: -125.98,55.12
PTC4: P2.2 U1.61 | length 569.4
  TopLayer w10: P2.2@-892.98,624 -872.8,603.82 -872.8,350.88 -873.2,350.49 U1.61
PTC5: P2.1 U1.62 | length 675.1
  TopLayer w10: U1.62@-893.02,59 -893.02,576.04 -924.98,608 -924.98,670 P2.1@-888.98,706
PTC6: P2.4 U1.63 | length 586.9
  TopLayer w10: P2.4@-967.98,627 -912.57,571.58 U1.63
PTC7: P2.3 U1.64 | length 690.7
  TopLayer w10: P2.3@-964.98,703 -1002.98,665 -1002.98,611 -933.02,541.04 U1.64@-933.02,57
PTC8: P2.6 U1.65 | length 601.4
  TopLayer w10: P2.6@-1043.98,623 -951.8,530.82 U1.65@-951.8,59.78
PTC9: P2.5 U1.66 | length 704.3
  TopLayer w10: P2.5@-1043,703.02 -1084.98,661.04 -1084.98,608 -971.62,494.64 U1.66
PTC10: P2.8 U1.67 | length 624.9
  TopLayer w10: P2.8@-1124.98,623 -990.8,488.82 -990.8,54.78 U1.67@-990.02,54
PTC11: P2.7 U1.68 | length 721.2
  TopLayer w10: P2.7@-1125.26,705.76 -1162.98,668.04 -1162.98,607 -1010.99,455.01 U1.68
PTC12: P2.10 U1.69 | length 637.1
  TopLayer w10: P2.10@-1204.98,621 -1031.02,447.04 U1.69@-1031.02,56
PTC13: P2.9 U1.70 | length 737.4
  TopLayer w10: P2.9@-1198.98,705 -1239.98,664 -1239.98,598 -1050.36,408.38 U1.70
PTC14: pad.0@-1280.72,703.74 U1.71 | length 781.8
  TopLayer w10: pad.0@-1278.98,705 -1317.98,666 -1317.98,602 -1299.98,584 -1263.98,584 -1070.05,390.06 U1.71
PTC15: P1.1 U1.72 | length 1075.4
  TopLayer w10: P1.1@-1711.85,699.83 -1654.8,642.78 -1654.8,513.88 -1550.92,410 -1242.02,410 -1089.73,257.71 U1.72
PTE5: R15.1 U1.6 U2.2 U2.3 | length 1515.4
  TopLayer w10: v1@-2129.02,-512 -1755.14,-138.12 U1.6@-1342.02,-138.12 ; -2291.91,-545.15 ccw(c-2275.47,-545.15) -2287.1,-556.77 cw(c-2275.47,-545.15) -2291.91,-545.15 ; -2291.91,-545.15 cw(c-2308.36,-545.15) -2296.73,-556.77 ccw(c-2308.36,-545.15) -2291.91,-545.15 ; -2291.91,-528.03 cw(c-2275.47,-528.03) -2287.1,-516.41 ccw(c-2275.47,-528.03) -2291.91,-528.03 ; -2291.91,-528.03 ccw(c-2308.36,-528.03) -2296.73,-516.41 cw(c-2308.36,-528.03) -2291.91,-528.03 ; -2243.98,-511.59 cw(c-2243.98,-495.15) -2255.6,-506.77 ccw(c-2243.98,-495.15) -2243.98,-511.59 ; -2243.98,-511.59 ccw(c-2243.98,-528.03) -2255.6,-516.41 cw(c-2243.98,-528.03) -2243.98,-511.59
  TopLayer w20: U2.3 v1@-2216.02,-511.59
  TopLayer w25: R15.1@-2404.02,-692 -2404.02,-606 -2359.02,-561 U2.2@-2301.02,-561 ; U2.2 U2.3
  BottomLayer w20: v1@-2217.02,-510 v1@-2132.02,-510
  other v1: -2129.02,-513 -2216.02,-512
PTE31: U1.23
RESET: C19.1 R4.2 SWD.10 U1.42 | length 1242.7
  TopLayer w10: U1.42@-772.8,-394.12 -405.8,-394.12 v6@-396.3,-403.62
  BottomLayer w25: SWD.10 -970.69,-699 -822.8,-551.12 -496.8,-551.12 -393.4,-447.72 C19.1 ; C19.1@-404.02,-404 R4.2@-300.02,-404
  other v6: -393.8,-404.12
RXD0: pad.3 U1.79 U3.12 | length 1959.5
  TopLayer w10: -2653.8,224.88 -2605.69,273 -1319.02,273 -1227.8,181.78 U1.79@-1227.8,60.1 ; -2557.03,65.11 ccw(c-2557.03,81.55) -2545.4,69.93 cw(c-2557.03,81.55) -2557.03,65.11 ; -2557.03,65.11 cw(c-2557.03,48.67) -2545.4,60.29 ccw(c-2557.03,48.67) -2557.03,65.11
  TopLayer w15: pad.3@-2701.8,180.88 -2654.8,180.88 ; -2653.8,224.88 -2653.8,148.78 -2570.13,65.11
  TopLayer w20: -2570.13,65.11 U3.12
RXD1: PIN6.4 U1.2 U2.1 | length 1198.3
  TopLayer w10: -2175.8,-525.78 -1709.02,-59 U1.2@-1351.02,-59
  TopLayer w15: PIN6.4@-2175.8,-561.12 -2175.8,-525.78
  TopLayer w20: U2.1@-2302.02,-612 -2227.69,-612 PIN6.4@-2177.8,-562.12
SCK1: pad.2@-1546.8,-80.12 U1.3 | length 193.5
  TopLayer w10: pad.2@-1542.55,-78.37 U1.3
SE4B: U1.21
SE9: P3.7 U1.44 | length 1192.3
  TopLayer w10: U1.44@-772.8,-356.12 -770.8,-354.12 391.71,-354.12 P3.7
SE12: P3.6 U1.45 | length 1296.1
  TopLayer w10: U1.45 337.04,-334.28 376.6,-294.72 451.12,-294.72 P3.6
SE13: P3.5 U1.46 | length 1211
  TopLayer w10: U1.46@-775.8,-315.12 311.38,-315.12 370.2,-256.3 P3.5
SWD_CLK: SWD.4 U1.26 | length 194
  TopLayer w10: SWD.4@-1149.02,-697 U1.26@-1149.02,-503
SWD_DIO: SWD.2 U1.29 | length 289.8
  TopLayer w10: v4@-1091.02,-655 U1.29@-1091.02,-495
  BottomLayer w10: SWD.2 -1200.02,-699 -1157.02,-656 v4@-1089.02,-656
  other v4: -1091.02,-656
SWO: SWD.6
TPM0_CH1: P1.3 U1.74 | length 1103
  TopLayer w10: P1.3 -1750.8,660.78 -1750.8,531.88 -1588.92,370 -1260.02,370 -1129.1,239.08 U1.74
TPM0_CH2: P1.4 U1.75 | length 1020.2
  TopLayer w10: P1.4@-1789.8,619.88 -1789.8,531.88 -1607.92,350 -1270.02,350 -1148.79,228.76 U1.75
TPM0_CH3: P1.5 U1.76 | length 1130.1
  TopLayer w10: P1.5@-1867.8,700.88 -1828.8,661.88 -1828.8,532.88 -1625.92,330 -1280.02,330 -1168.47,218.45 U1.76
TPM0_CH4: P1.6 U1.77 | length 1045.1
  TopLayer w10: P1.6@-1869.8,620.88 -1869.8,539.88 -1640.92,311 -1291.02,311 -1188.16,208.13 U1.77
TPM0_CH5: P1.7 U1.78 | length 1155
  TopLayer w10: P1.7@-1945.8,699.88 -1909.8,663.88 -1909.8,536.88 -1666.92,294 -1304.02,294 -1207.84,197.82 U1.78
TXD0: pad.2@-2600.8,177.88 U1.80 U3.11 | length 1699.7
  TopLayer w10: -2600.8,224.88 -2571.69,254 -1330.02,254 -1246.8,170.78 -1246.8,51.22 U1.80@-1248.02,50
  TopLayer w15: pad.2@-2600.8,165.78 -2600.8,224.88
  TopLayer w20: pad.2@-2600.8,165.78 -2550.13,115.11 U3.11@-2503.02,115.11
TXD1: PIN6.3 U1.1 U2.4 | length 1120.9
  TopLayer w10: PIN6.3@-2145.58,-461.59 -1722.98,-39 U1.1@-1346.02,-39
  TopLayer w20: U2.4 PIN6.3@-2145.58,-461.59
UART_RX: SWD.8
UART_TX: SWD.7
USB_DM: R-.1 USB.2 | length 156.3
  TopLayer w15: USB.2 -2408.19,-1012.5 R-.1@-2349.8,-954.12
USB_DP: R+.1 USB.3 | length 128.9
  TopLayer w10: R+.1@-2365.93,-1044 R+.1@-2356.8,-1053.12
  TopLayer w15: USB.3 R+.1@-2365.93,-1044
VCC: C1.1 C2.2 C3.2 C20.2 D0.2 D0.7.1 L1.2 pad.0@-1280.72,625 pad.0@-1485.8,-259.12 pad.1@-1546.8,-262.12 pad.11 PIN3.2 PV1.1 PV2.1 R8.2 R15.2 U1.12 U2.8 U3.16 USB.1 | length 12302.6
  TopLayer w10: pad.0@-1477.8,-255.53 U1.12
  TopLayer w20: C20.2@-2511.8,-300.12 C20.2@-2509.09,-297.4 ; USB.1@-2481.97,-978.12 v1@-2481.97,-952.28
  TopLayer w40: -3046.8,-300.12 C20.2@-2511.8,-300.12 ; -2646.8,775.88 -2646.8,777.88 -2631.8,793.88 137.2,793.88 131.25,788.68 143.2,787.88 ; C20.2@-2509.09,-297.4 U3.16@-2509.09,-141.12 ; PIN3.2@-2448.8,482.88 -2448.8,793.88 ; 145.2,788.88 158.98,775.1 158.98,564.04 562.98,160.04 562.98,-832.12
  TopLayer w50: -2646.8,775.88 -2646.8,503.88 -3059.8,90.88 -3059.8,-698.12 R15.2@-2495.8,-698.12 ; PV1.1@-1950.8,-867.12 -1850.8,-767.12 PV2.1 ; PV1.1@-1946.3,-870.62 -2263.8,-1188.12 -2263.8,-1545 -1400.8,-1545 v3@-1400.8,-1499.12 ; PV2.1@-1852.8,-667.12 -1852.8,-577.78 -1553.21,-278.18
  BottomLayer w15: v5(-1320,795) -1320,664.28 pad.0@-1280.72,625
  BottomLayer w50: v1@-2498.8,-689.12 v6(-2498.8,-611.12) ; v1(-2480.8,-951.12) -2029.8,-951.12 PV1.1@-1949.8,-871.12 ; v3@-1398.8,-1509.12 -1398.8,-1152.12 -1337.8,-1091.12 v8@-748.8,-1091.12
  other v1: -2263.8,-1520.12 100.2,-923.12 -0.8,-922.12 -137.8,-888.12 -2498.8,-694.12
  other v3: -1398.8,-1504.12 -750.8,-1191.12
  other v8: -750.8,-1091.12
  other v9: -599.62,-1020.12 -719.8,-910.12
VO33: C18.2 U1.11 | length 260.5
  TopLayer w10: v1(-1605.8,-243.12) -1600.54,-235.85 U1.11
XTAL: 4M.1 C14.1 R16.1 U1.41 | length 547.5
  TopLayer w15: U1.41 -684.91,-413.02 -577.4,-520.52 4M.1
  BottomLayer w25: R16.1 C14.1@-532.4,-722.12
  BottomLayer w35: -574.4,-722.12 4M.1@-574.4,-622.12
pads on no net: P-CCD.1 SWD.9 U1. U3.7 U3.8 U3.9 U3.10 USB.MH1 USB.MH2
copper on no net:
  other v7: -2901.02,-1429 398.98,-1429 -2900.24,620.28 400.2,621.88
  other v10: 0,-75
  other v11: 0,75

## Polygon pours and split planes (outlines as drawn)
3.3V on TopLayer "TopLayer-3.3V" (solid, remove dead copper, pour order 1000): -3105,830 600,830 600,-1620 -3100,-1620 -3100,830
NetC03_1 on TopLayer "TopLayer-NetC03_1 1" (solid, remove dead copper, pour order 1000): -2105,-1065 -2015,-1065 -2015,-1440 -2105,-1440
GND on TopLayer "TopLayer-GND" (solid, remove dead copper, pour order 1004): -1341.65,78.87 -769.8,78.87 -769.8,-520.12 -1356.8,-520.12 -1356.8,79.88 -1341.65,79.88
NetC03_1 on TopLayer "TopLayer-NetC03_1" (solid, remove dead copper, pour order 1003): -2060.8,-1407.12 -1688.8,-1407.12 -1688.8,-1520 -2062.8,-1520 -2062.8,-1407.12
NetC01_2 on TopLayer "TopLayer-NetC01_2" (solid, remove dead copper, pour order 1002): -1998.4,-1145 -1698.8,-1145 -1698.8,-1396.12 -2010,-1396.12 -2010,-1146.04 -1998.4,-1146.04
VCC on TopLayer "TopLayer-VCC" (solid, remove dead copper, pour order 1001): -781.8,-1242.12 -541.13,-1242.12 -541.13,-1113.12 594.2,-1113.12 594.2,-822.12 -781.8,-822.12
NetF1_2 on TopLayer "TopLayer-NetF1_2" (solid, remove dead copper, pour order 1000): -529.28,-1121.12 -300.8,-1121.12 -300.8,-1379.12 -759.8,-1379.12 -759.8,-1255.1 -556.82,-1255.1 -556.82,-1121.12
GND on BottomLayer "BottomLayer-GND" (solid, remove dead copper, pour order 1001): -3100,830 600,830 600,-1615 -3100,-1615

## Keep-outs
KeepOutLayer:
  circle w10: c-2900.8,619.88 r200
  circle w10: c400.18,621.5 r177.17
  circle w10: c394.41,-1430.4 r193.24
  lines w7.87: -3101.02,-1619 -111.02,-1619 468.98,-1619 598.98,-1619 598.98,829.88 -3100.8,829.88 -3101.02,829.66 -3101.02,-1619
  lines w10: -3101.02,-848.12 -2790.8,-848.12 -2790.8,-1268.12 -2704.8,-1354.12 -2704.8,-1618.12

## Other copper
TopLayer:
  text "2014 12 12" at -125,-800 h40
  text "BTBU" at -370,-805 h55

## Silkscreen, mask and mechanical layers (free items; w line width, h text height)
TopOverlay:
  circle w39.37: c400.18,621.48 r111.34
  circle w10: c400.18,621.48 r196.85
  circle w10: c394.41,-1430.4 r190
  circle w39.37: c394.41,-1430.4 r111.34
  circle w10: c-2899.59,-1429.4 r190
  circle w39.37: c-2899.59,-1429.4 r111.34
  circle w10: c-2900.8,619.88 r196.85
  circle w39.37: c-2900.8,619.88 r111.34
  lines w7.87: -3097.65,619.88 -3018.91,619.88 -3058.28,619.88 ; -3096.44,-1429.4 -3017.7,-1429.4 -3057.07,-1429.4 ; -2969.59,-1331.29 -2969.59,-1259 ; -2900.8,737.99 -2900.8,816.73 ; -2899.8,420 -2899.8,490 ; -2899.59,-1619 -2899.59,-1547.51 ; -2782.69,619.88 -2703.95,619.88 ; -2781.48,-1429.4 -2702.74,-1429.4 ; 203.2,-1430.4 276.3,-1430.4 236.93,-1430.4 ; 203.33,621.48 282.07,621.48 242.7,621.48 ; 324.98,-1331.74 324.98,-1259 ; 394.41,-1619 394.41,-1548.51 ; 400.18,419.88 400.18,493.37 ; 400.18,739.59 400.18,818.33 ; 512.52,-1430.4 591.26,-1430.4 ; 518.29,621.48 597.03,621.48
  text "GND" at -2859.8,302.88 h60
  text "TXD" at -2700,50 h45
  text "RXD" at -2690,-70 h45
  text "BTBU" at -1105,-135 h30
  text "GND" at -2695,-175 h45
  text "KL25-80" at -1230,-245 h50
  text "Huo Liangsehng" at -1265,-330 h30
  text "A+" at -2793.8,-399.12 h50
  text "REST" at -485,-480 h45
  text "B-" at -2800.8,-734.12 h50
  text "main control" at -255,-740 h40
  text "+5V" at -665.8,-916.12 h40
  text "KL25-80" at 125,-1060 h60
  text "GND" at -253.8,-1240.12 h40
  text "+5V" at -58.8,-1245.12 h40
  text "VCC" at -2656.8,-1533.12 h45
  text "VCC" at -190.8,-1552.12 h80
  text "+" at -605.8,-1555.12 h80
BottomOverlay:
  text "GND" at -2776.8,258.88 h80
Mechanical1:
  circle w10: c-2899.59,-1429.4 r84.65

## Text inside footprints (layer, text, board x,y; h text height)
P-CCD: TopOverlay "6" at 200,-565 h50; TopOverlay "5" at 200,-680 h50; TopOverlay "2" at -250,-570 h50; TopOverlay "1" at -240,-680 h50
SWD: TopOverlay "1" at -1281.02,-769 h39.37; TopOverlay "9" at -945.12,-769 h39.37
USB: Mechanical1 "PCB Edge" at -2808.04,-885.09 h9.84 r270